# EAGLE board Talos v102 (EAGLE 9.7.0)
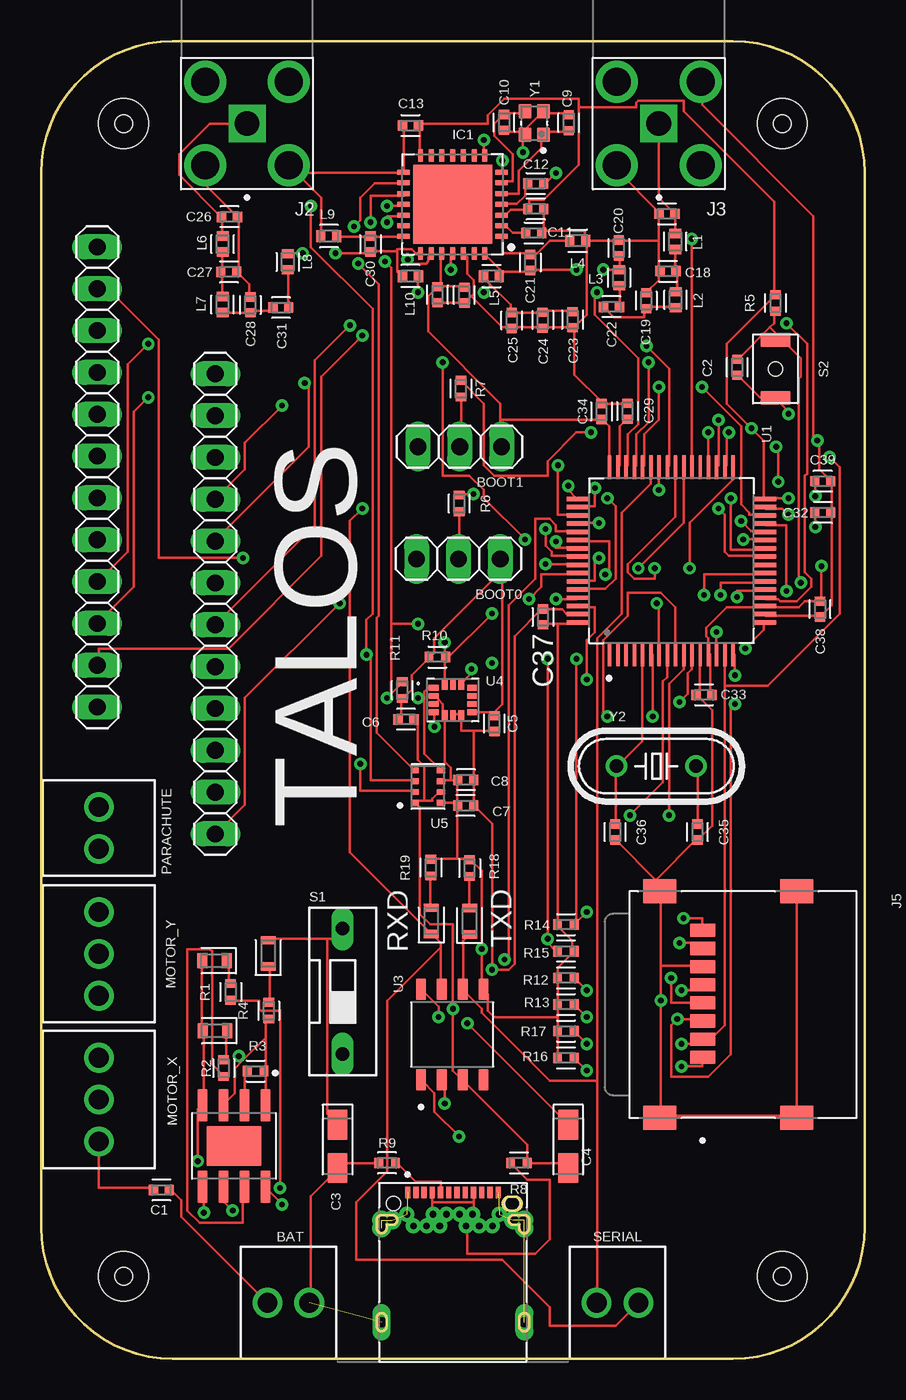
[diagram p0: board, top side]
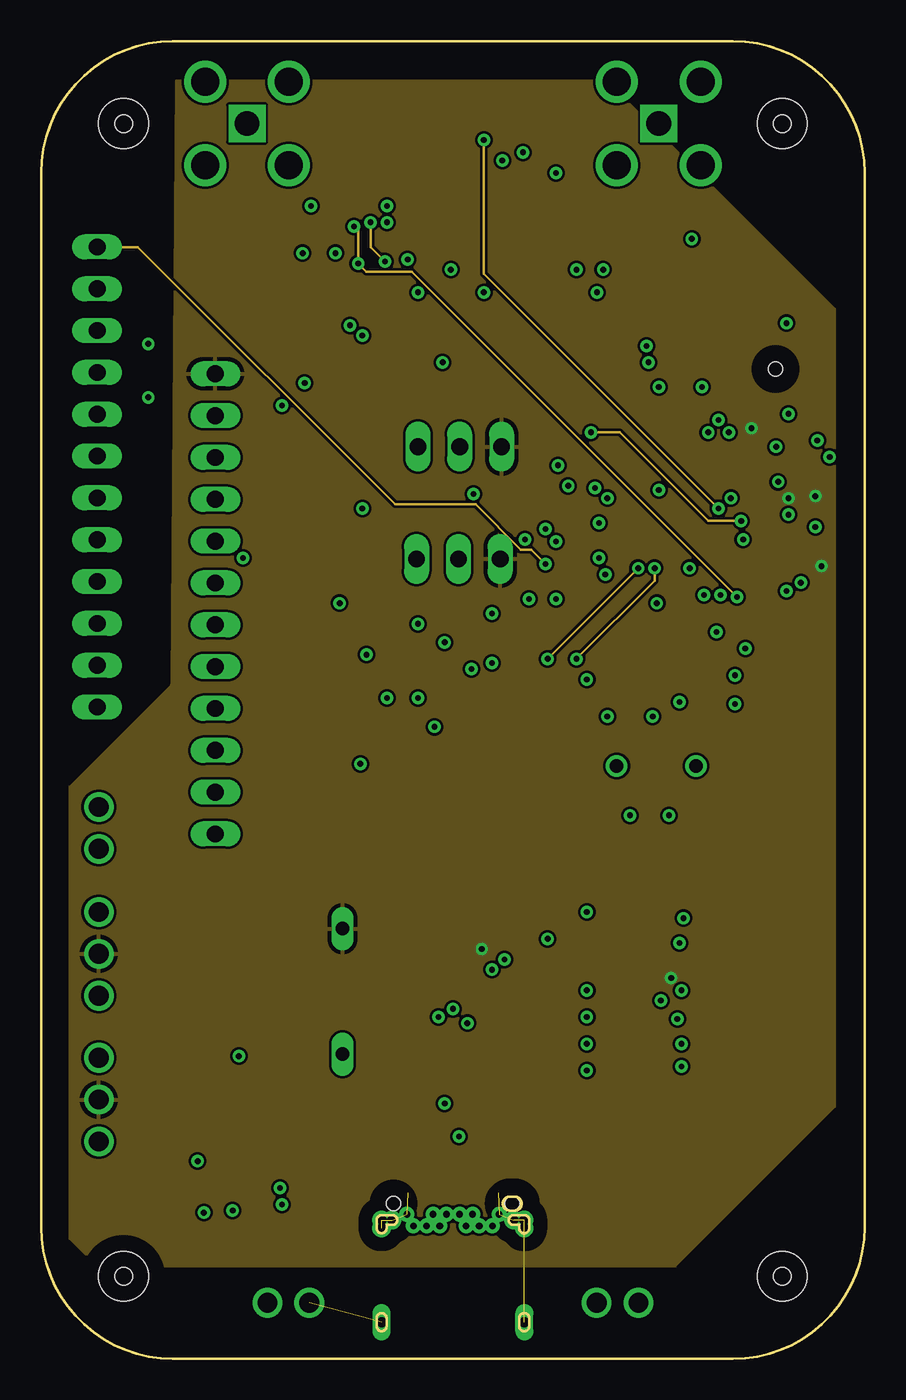
[diagram p1: board, inner layer Route2]
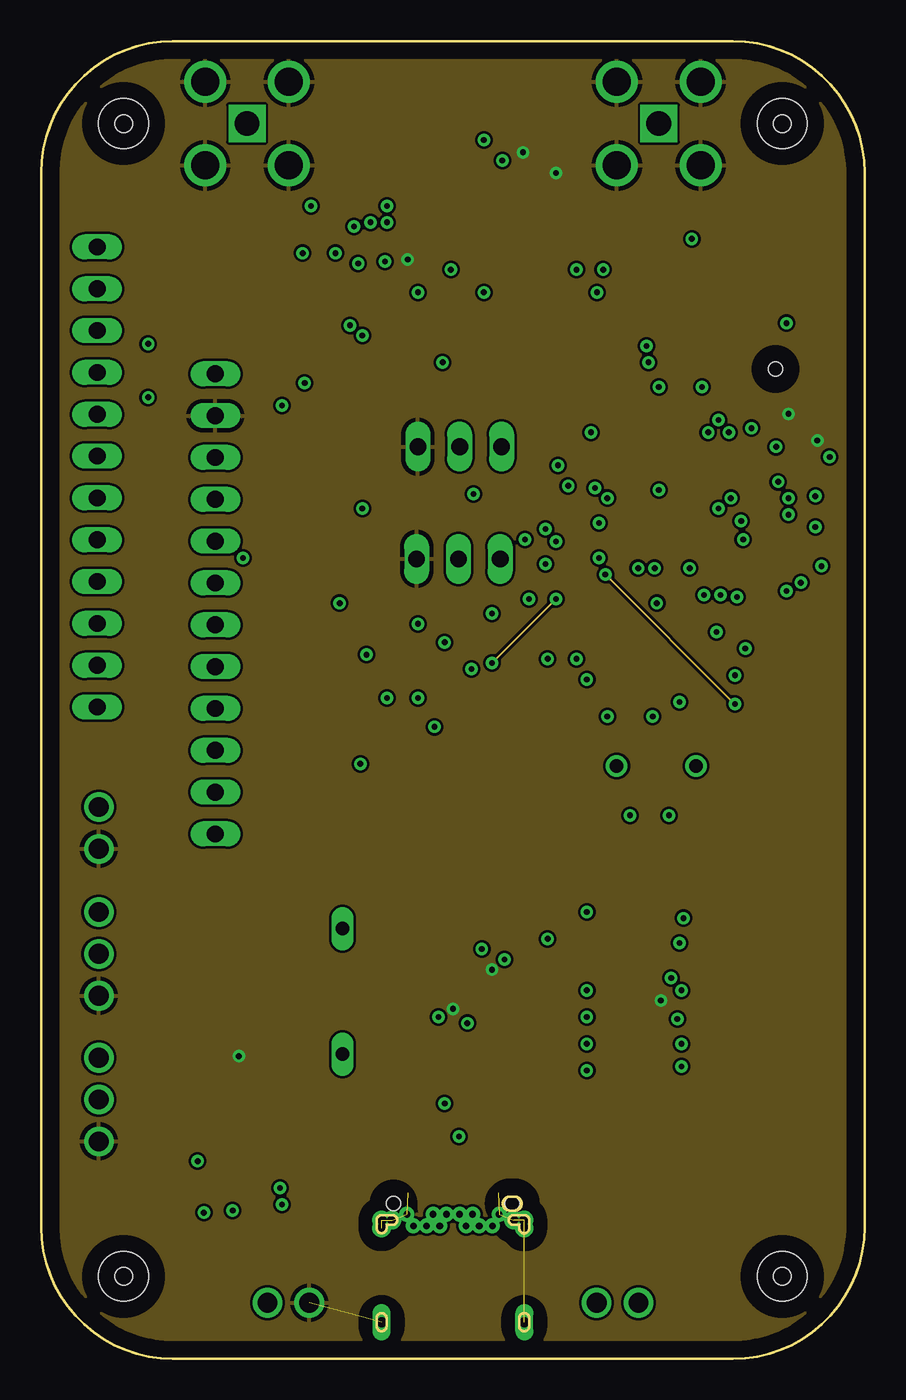
[diagram p2: board, inner layer Route15]
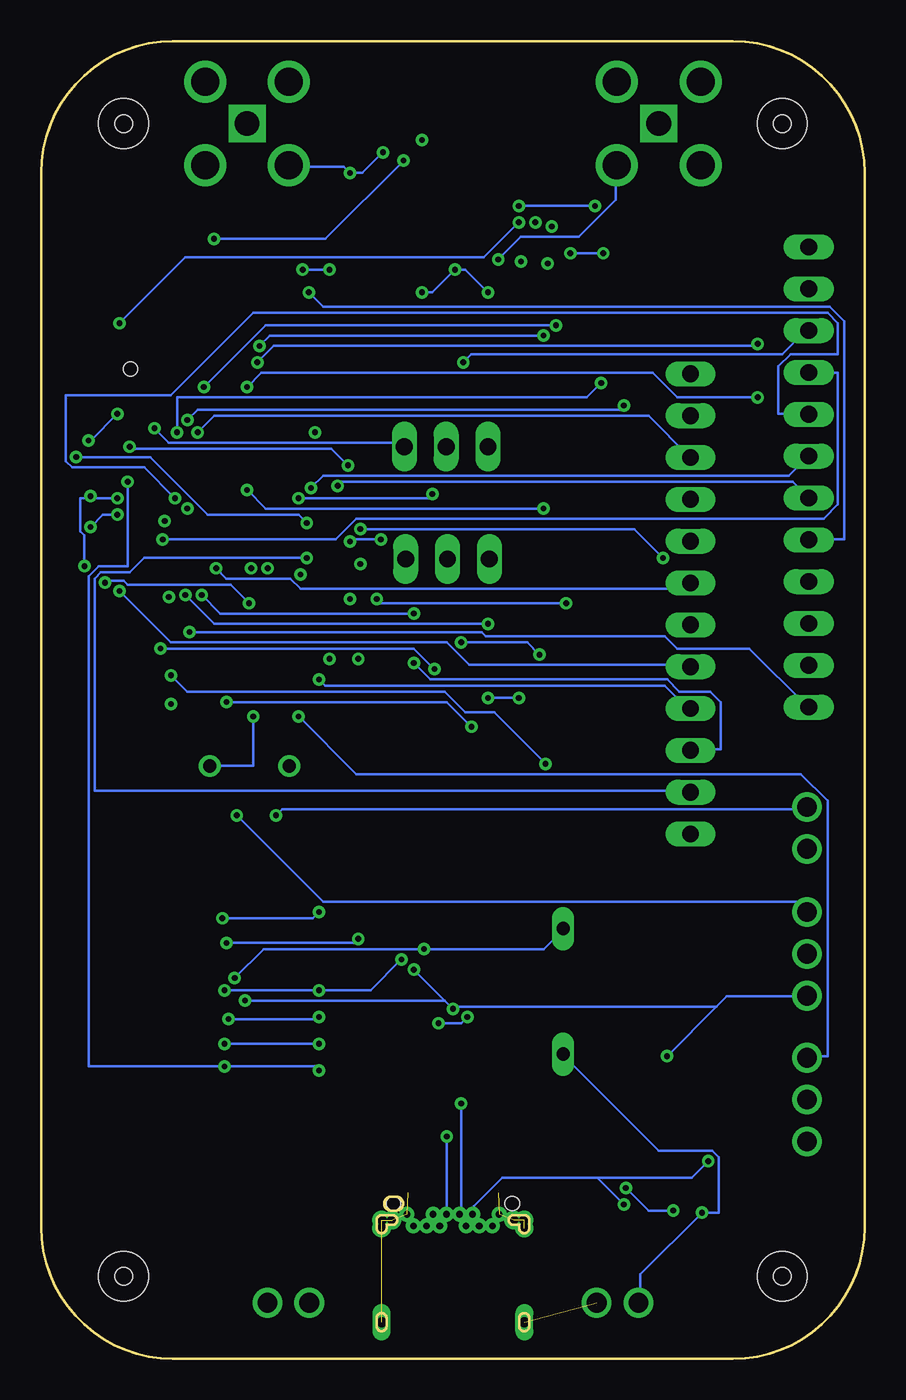
[diagram p3: board, bottom side, seen from below]

Size 50 x 80 mm. Coordinates in mm from the lower left corner, seen from the top.
Outline: 418 segments
Copper layers (1+2*15+16): Top 0.035mm / dielectric 1.5mm / Route2 0.035mm / dielectric 0.15mm / Route15 0.035mm / dielectric 0.2mm / Bottom 0.035mm
Design rules "Fusion Electronics Design Rules *": minimum track width 6mil, minimum drill 0.35mm, track to track 6mil, track to pad 6mil, pad to pad 6mil, via to via 6mil, smd to smd 6mil, copper to edge 40mil, drill to drill 6mil, minimum pad ring 10mil, minimum via ring 8mil, stop-mask expansion 4mil, vias tented up to drill 0mil, thermal gap 10mil
Holes 1.05 mm at 5,75 45,75 5,5 45,5
Holes 3 mm at 5,75 45,75 5,5 45,5

## Footprints (pad centres in the part's own frame; a part is rotated, then mirrored left to right if it is on the bottom)
TERMBLK_254-2N = drill 1.2: 1 0,0; 2 2.54,0
1X03 = drill 1.016 long: 1 -2.54,0; 2 0,0; 3 2.54,0
CAPC1005X60 = smd 0.56 x 0.629: 1 -0.485,0; 2 0.485,0
CAPMP3216X180N = smd 1.796 x 1.189: 1 -1.31,0; 2 1.31,0
LEDC1608X35N_FLAT-R = smd 0.612 x 0.912: A 0.75,0; C -0.75,0
LEDC1608X35N_FLAT-G = smd 0.612 x 0.912: A 0.75,0; C -0.75,0
QFN65P600X600X100-29T480 = smd 0.75 x 0.3: 1 -2.975,1.95; 2 -2.975,1.3; 3 -2.975,0.65; 4 -2.975,0; 5 -2.975,-0.65; 6 -2.975,-1.3; 7 -2.975,-1.95; 15 2.975,-1.95; 16 2.975,-1.3; 17 2.975,-0.65; 18 2.975,0; 19 2.975,0.65; 20 2.975,1.3; 21 2.975,1.95 | smd 0.3 x 0.75: 8 -1.95,-2.975; 9 -1.3,-2.975; 10 -0.65,-2.975; 11 0,-2.975; 12 0.65,-2.975; 13 1.3,-2.975; 14 1.95,-2.975; 22 1.95,2.975; 23 1.3,2.975; 24 0.65,2.975; 25 0,2.975; 26 -0.65,2.975; 27 -1.3,2.975; 28 -1.95,2.975 | smd 4.8 x 4.8: 29 0,0
CUI_UJ31-CH-31-SMT-TR = drill 0.6 pad 0.9: 1 -3.68,-1.66; 2 -4.33,-1.66; 3 -4.33,-2.16; 4 3.68,-1.66; 5 4.33,-1.66; 6 4.33,-2.16 | smd 0.32 x 0.7: A1 -2.75,0; A2 -2.25,0; A3 -1.75,0; A4 -1.25,0; A5 -0.75,0; A6 -0.25,0; A7 0.25,0; A8 0.75,0; A9 1.25,0; A10 1.75,0; A11 2.25,0; A12 2.75,0 | drill 0.4 pad 0.6: B1 2.8,-1.31; B2 2.4,-2.01; B3 1.6,-2.01; B4 1.2,-1.31; B5 0.8,-2.01; B6 0.4,-1.31; B7 -0.4,-1.31; B8 -0.8,-2.01; B9 -1.2,-1.31; B10 -1.6,-2.01; B11 -2.4,-2.01; B12 -2.8,-1.31 | drill 0.6 pad 0.9 long: S1 -4.33,-7.86; S2 4.33,-7.86 | hole 0.85: -3.6,-0.66; 3.6,-0.66
132203RP = drill 1.5 square: 1 0,0 | drill 1.7: 2 -2.54,2.54; 3 2.54,2.54; 4 2.54,-2.54; 5 -2.54,-2.54
CUI_MSD-10-C = smd 0.8 x 1.5: 01 3.2,-2.45; 02 2.1,-2.45; 03 1,-2.45; 04 -0.1,-2.45; 05 -1.2,-2.45; 06 -2.3,-2.45; 07 -3.4,-2.45; 08 -4.5,-2.45 | smd 1.45 x 2: G1 -6.875,3.25; G2 6.875,3.25; G3 -6.875,-5.05; G4 6.875,-5.05
1X12 = drill 1.016 long: 1 -13.97,0; 2 -11.43,0; 3 -8.89,0; 4 -6.35,0; 5 -3.81,0; 6 -1.27,0; 7 1.27,0; 8 3.81,0; 9 6.35,0; 10 8.89,0; 11 11.43,0; 12 13.97,0
INDC1006X60N = smd 0.56 x 0.729: 1 -0.485,0; 2 0.485,0
LEDC1608X39N_B = smd 0.512 x 0.912: 1 -0.8,0; 2 0.8,0
TERMBLK_254-3N = drill 1.2: 1 0,0; 2 2.54,0; 3 5.08,0
RESC1005X40 = smd 0.535 x 0.644: 1 -0.507,0; 2 0.507,0
LEDC1608X39N_R = smd 0.512 x 0.912: 1 -0.8,0; 2 0.8,0
DS-01 = drill 0.813 long: 1 0,-3.81; 2 0,3.81
B3U-1000P(M)-B = smd 0.8 x 1.8: 1 -1.75,0; 2 1.75,0 | hole 0.85: 0,0
LEDC1608X39N_G = smd 0.512 x 0.912: 1 -0.8,0; 2 0.8,0
QFP50P1200X1200X160-64N = smd 1.47 x 0.28: 1 -5.67,3.75; 2 -5.67,3.25; 3 -5.67,2.75; 4 -5.67,2.25; 5 -5.67,1.75; 6 -5.67,1.25; 7 -5.67,0.75; 8 -5.67,0.25; 9 -5.67,-0.25; 10 -5.67,-0.75; 11 -5.67,-1.25; 12 -5.67,-1.75; 13 -5.67,-2.25; 14 -5.67,-2.75; 15 -5.67,-3.25; 16 -5.67,-3.75; 33 5.67,-3.75; 34 5.67,-3.25; 35 5.67,-2.75; 36 5.67,-2.25; 37 5.67,-1.75; 38 5.67,-1.25; 39 5.67,-0.75; 40 5.67,-0.25; 41 5.67,0.25; 42 5.67,0.75; 43 5.67,1.25; 44 5.67,1.75; 45 5.67,2.25; 46 5.67,2.75; 47 5.67,3.25; 48 5.67,3.75 | smd 0.28 x 1.47: 17 -3.75,-5.67; 18 -3.25,-5.67; 19 -2.75,-5.67; 20 -2.25,-5.67; 21 -1.75,-5.67; 22 -1.25,-5.67; 23 -0.75,-5.67; 24 -0.25,-5.67; 25 0.25,-5.67; 26 0.75,-5.67; 27 1.25,-5.67; 28 1.75,-5.67; 29 2.25,-5.67; 30 2.75,-5.67; 31 3.25,-5.67; 32 3.75,-5.67; 49 3.75,5.67; 50 3.25,5.67; 51 2.75,5.67; 52 2.25,5.67; 53 1.75,5.67; 54 1.25,5.67; 55 0.75,5.67; 56 0.25,5.67; 57 -0.25,5.67; 58 -0.75,5.67; 59 -1.25,5.67; 60 -1.75,5.67; 61 -2.25,5.67; 62 -2.75,5.67; 63 -3.25,5.67; 64 -3.75,5.67
SOP127P600X175-9N = smd 1.97 x 0.6: 1 -2.475,1.905; 2 -2.475,0.635; 3 -2.475,-0.635; 4 -2.475,-1.905; 5 2.475,-1.905; 6 2.475,-0.635; 7 2.475,0.635; 8 2.475,1.905 | smd 2.413 x 3.302: 9 0,0
SOIC127P600X160-8N = smd 1.31 x 0.62: 1 -2.75,1.905; 2 -2.75,0.635; 3 -2.75,-0.635; 4 -2.75,-1.905; 5 2.75,-1.905; 6 2.75,-0.635; 7 2.75,0.635; 8 2.75,1.905
PQFN50P300X250X86-14N = smd 0.6 x 0.35: 1 -1.16,0.75; 2 -1.16,0.25; 3 -1.16,-0.25; 4 -1.16,-0.75; 8 1.16,-0.75; 9 1.16,-0.25; 10 1.16,0.25; 11 1.16,0.75 | smd 0.35 x 0.6: 5 -0.5,-0.91; 6 0,-0.91; 7 0.5,-0.91; 12 0.5,0.91; 13 0,0.91; 14 -0.5,0.91
XDCR_BMP280 = smd 0.5 x 0.35: 1 0.8,0.975; 2 0.8,0.325; 3 0.8,-0.325; 4 0.8,-0.975; 5 -0.8,-0.975; 6 -0.8,-0.325; 7 -0.8,0.325; 8 -0.8,0.975
OSCCC200X160X50 = smd 0.89 x 0.79: 1 -0.715,-0.565; 2 0.715,-0.565; 3 0.715,0.565; 4 -0.715,0.565
HC49US = drill 0.813: 1 -2.413,0; 2 2.413,0

## Placement (x,y rotation side)
BAT  TERM-BLK-2P  [TERMBLK_254-2N]  13.74,3.4 0 top
BOOT0  PINHD-1X03_1X03M  [1X03]  25.33,48.57 180 top
BOOT1  PINHD-1X03_1X03M  [1X03]  25.41,55.38 180 top
C1  0.1uF  [CAPC1005X60]  7.3,10.25 0 top
C2  0.1uF  [CAPC1005X60]  42.27,60.2 270 top
C3  0.1uF  [CAPMP3216X180N]  18,12.9 270 top
C4  0.1uF  [CAPMP3216X180N]  32,12.9 270 top
C5  100nF  [CAPC1005X60]  27.51,38.57 270 top
C6  100nF  [CAPC1005X60]  22.15,38.83 0 top
C7  100nF  [CAPC1005X60]  25.77,33.59 0 top
C8  100nF  [CAPC1005X60]  25.78,35.15 0 top
C9  15pF  [CAPC1005X60]  32.04,75.05 270 top
C10  15pF  [CAPC1005X60]  28.1,75.07 270 top
C11  100nF  [CAPC1005X60]  29.9,68.36 180 top
C12  100nF  [CAPC1005X60]  30.03,71.35 180 top
C13  100nF  [CAPC1005X60]  22.42,74.88 180 top
C14  100nF  [CAPC1005X60]  30.03,69.81 0 top
C15  100nF  [CAPC1005X60]  24.07,64.61 270 top
C16  100nF  [CAPC1005X60]  25.69,64.58 270 top
C17  4.7pF  [CAPC1005X60]  37.99,69.52 180 top
C18  12pF  [CAPC1005X60]  38.05,66.04 180 top
C19  15pF  [CAPC1005X60]  36.74,64.25 90 top
C20  6.8pF  [CAPC1005X60]  35.06,67.45 90 top
C21  2.2pF  [CAPC1005X60]  29.7,66.56 90 top
C22  47pF  [CAPC1005X60]  34.63,63.87 0 top
C23  100pF  [CAPC1005X60]  32.26,63.08 90 top
C24  47pF  [CAPC1005X60]  30.45,63.06 90 top
C25  10nF  [CAPC1005X60]  28.57,63.05 270 top
C26  1.8pF  [CAPC1005X60]  11.44,69.33 0 top
C27  4.7pF  [CAPC1005X60]  11.39,65.99 0 top
C28  4.7pF  [CAPC1005X60]  12.7,63.99 90 top
C29  100nF  [CAPC1005X60]  35.6,57.54 90 top
C30  1.5pF  [CAPC1005X60]  19.99,67.68 90 top
C31  33pF  [CAPC1005X60]  14.55,63.82 0 top
C32  100nF  [CAPC1005X60]  47.46,51.38 0 top
C33  100nF  [CAPC1005X60]  40.25,40.31 180 top
C34  100nF  [CAPC1005X60]  34.02,57.52 90 top
C35  [CAPC1005X60]  39.85,31.99 270 top
C36  [CAPC1005X60]  34.85,31.99 270 top
C37  100nF  [CAPC1005X60]  30.47,45.05 90 top
C38  100nF  [CAPC1005X60]  47.29,45.52 270 top
C39  100nF  [CAPC1005X60]  47.45,53.28 0 top
D1  LED_RED  [LEDC1608X35N_FLAT-R]  10.55,19.92 180 top
D2  LED_GREEN  [LEDC1608X35N_FLAT-G]  10.53,24.17 180 top
IC1  SX1276  [QFN65P600X600X100-29T480]  24.98,70.09 180 top
J1  USB-TYPE-C  [CUI_UJ31-CH-31-SMT-TR]  25,10.09 0 top
J2  132203RP  [132203RP]  12.5,75 180 top
J3  132203RP  [132203RP]  37.5,75 180 top
J5  MSD-10-C  [CUI_MSD-10-C]  42.61,21.51 270 top
JP1  PINHD-1X12  [1X12]  3.4,53.54 90 top
JP2  PINHD-1X12  [1X12]  10.57,45.83 90 top
L1  18nH  [INDC1006X60N]  38.5,67.84 270 top
L2  12nH  [INDC1006X60N]  38.52,64.3 270 top
L3  22nH  [INDC1006X60N]  35.09,65.64 90 top
L4  18nH  [INDC1006X60N]  32.58,67.88 180 top
L5  47nH  [INDC1006X60N]  27.33,65.74 180 top
L6  7.5nH  [INDC1006X60N]  11.01,67.68 270 top
L7  8.2nH  [INDC1006X60N]  11.01,64.01 270 top
L8  10nH  [INDC1006X60N]  14.97,66.6 90 top
L9  5.6nH  [INDC1006X60N]  17.47,68.16 0 top
L10  33nH  [INDC1006X60N]  22.42,65.74 0 top
LED1  LED-BLUE  [LEDC1608X39N_B]  13.79,24.61 90 top
MOTOR_X  TERM-BLK-3P  [TERMBLK_254-3N]  3.5,18.28 270 top
MOTOR_Y  TERM-BLK-3P  [TERMBLK_254-3N]  3.5,27.13 270 top
PARACHUTE  TERM-BLK-2P  [TERMBLK_254-2N]  3.5,33.5 270 top
R1  [RESC1005X40]  11.5,22.27 90 top
R2  [RESC1005X40]  11.08,17.65 90 top
R3  [RESC1005X40]  13.02,17.46 180 top
R4  [RESC1005X40]  13.82,21.13 90 top
R5  [RESC1005X40]  44.58,64.11 90 top
R6  10k  [RESC1005X40]  25.38,51.93 270 top
R7  10k  [RESC1005X40]  25.48,58.91 90 top
R8  5.1k  [RESC1005X40]  29,11.9 180 top
R9  5.1k  [RESC1005X40]  21,11.9 0 top
R10  10k  [RESC1005X40]  24.06,42.61 180 top
R11  10k  [RESC1005X40]  21.92,40.6 270 top
R12  [RESC1005X40]  31.86,23.13 180 top
R13  [RESC1005X40]  31.86,21.51 180 top
R14  [RESC1005X40]  31.86,26.37 180 top
R15  [RESC1005X40]  31.86,24.75 0 top
R16  [RESC1005X40]  31.86,18.28 180 top
R17  [RESC1005X40]  31.86,19.89 180 top
R18  1k  [RESC1005X40]  26.01,29.79 90 top
R19  1k  [RESC1005X40]  23.66,29.83 90 top
RXD  LED-RED  [LEDC1608X39N_R]  23.69,26.59 90 top
S1  DS-01  [DS-01]  18.3,22.31 0 top
S2  B3U-1000P(M)-B  [B3U-1000P(M)-B]  44.58,60.11 90 top
SERIAL  TERM-BLK-2P  [TERMBLK_254-2N]  33.72,3.4 0 top
TXD  LED-GREEN  [LEDC1608X39N_G]  26.01,26.57 90 top
U1  STM32F405RGT6  [QFP50P1200X1200X160-64N]  38.27,48.46 90 top
U2  TP4056  [SOP127P600X175-9N]  11.71,12.92 270 top
U3  CH340N  [SOIC127P600X160-8N]  24.96,19.7 90 top
U4  LSM6DSMTR  [PQFN50P300X250X86-14N]  25,40 0 top
U5  BMP280  [XDCR_BMP280]  23.48,34.74 180 top
Y1  FA-128_32.0000MF20X-K5  [OSCCC200X160X50]  29.93,75.02 90 top
Y2  16MHZ  [HC49US]  37.35,35.99 180 top

## Library data of the parts
BAT PARACHUTE SERIAL = Connector; CATEGORY: Fixed Terminal Blocks; DESCRIPTION: Fixed Terminal Blocks 2P SIDE ENTRY 2.54mm; MANUFACTURER: TE Connectivity AMP Connectors; MPN: 282834-2; OPERATING_TEMPERATURE: -40°C ~ 105°C; PART_STATUS: Active; PITCH: 0.100" (2.54mm); ROHS_COMPLIANCE: RoHS Compliant; SERIES: Buchanan; SUBCATEGORY: Terminal Blocks; TYPE: Through Hole; Screw - Rising Cage Clamp; Side wire entry, Horizontal with Board
BOOT0 BOOT1 = Tinkercad
C1-C39 = Capacitor; CATEGORY: Capacitor
D1 = LED; CATEGORY: LED; COLOR: RED; DESCRIPTION: CHIP LED FLAT; SUB-CATEGORY: CHIP; TYPE: FLAT_TOP
D2 = LED; CATEGORY: LED; COLOR: GREEN; DESCRIPTION: CHIP LED FLAT; SUB-CATEGORY: CHIP; TYPE: FLAT_TOP
IC1 = IC_Wireless-RF; CATEGORY: IC_Wireless-RF; DESCRIPTION: IC RF TXRX 802.15.4 28VQFN; FREQUENCY: 137 - 1020 MHz; MANUFACTURER: Semtech; MPN: SX1276IMLTRT; OPERATING_TEMP: -40°C to 85°C; PART_STATUS: Active; SERIES: SX1276; SUB-CATEGORY: Transceiver; TYPE: LoRa Core™
J1 = SnapEDA Library; MANUFACTURER: CUI Devices; MAXIMUM_PACKAGE_HEIGHT: 3.21 mm; PARTREV: 1.03; STANDARD: Manufacturer Recommendations
J2 J3 = SnapEDA Library; MANUFACTURER: AMPHENOL CONEXX; PARTREV: C; STANDARD: Manufacturer recommendations
J5 = SnapEDA Library; MANUFACTURER: CUI Devices; MAXIMUM_PACKAGE_HEIGHT: 2.07mm; PARTREV: 1.0; STANDARD: Manufacturer Recommendations
JP1 JP2 = Connector; CATEGORY: Headers; DESCRIPTION: Header, Straight, 12 Position; MANUFACTURER: Generic; MPN: Generic; OPERATING_TEMPERATURE: Generic; PART_STATUS: Active; PITCH: 0.100" (2.54mm); ROHS_COMPLIANCE: Generic; SERIES: Generic; SUB-CATEGORY: Headers, Male Pins; TYPE: Board to Board or Cable, Unshrouded, Through Hole, Straight
L1-L10 = Inductor; CATEGORY: Inductor; SUB-CATEGORY: Fixed
LED1 = Tutorial - Fusion 360; CATEGORY: Opto-Electronic; COLOR: Blue; SUB-CATEGORY: LED
MOTOR_X MOTOR_Y = Connector; CATEGORY: Fixed Terminal Blocks; DESCRIPTION: Fixed Terminal Blocks 3P TERMINAL BLOCK; MANUFACTURER: TE Connectivity AMP Connectors; MPN: 282834-3; OPERATING_TEMPERATURE: -40°C ~ 105°C; PART_STATUS: Active; PITCH: 0.100" (2.54mm); ROHS_COMPLIANCE: RoHS Compliant; SERIES: Buchanan; SUBCATEGORY: Terminal Blocks; TYPE: Through Hole; Screw - Rising Cage Clamp; Side wire entry, Horizontal with Board
R1 R2 R4-R19 = Resistor; CATEGORY: Resistor; SUB-CATEGORY: Fixed
R3 = Tinkercad; CATEGORY: Resistor; SUB-CATEGORY: Fixed
RXD = Tutorial - Fusion 360; CATEGORY: Opto-Electronic; COLOR: Red; SUB-CATEGORY: LED
S1 = Switch; CATEGORY: SWITCH; TYPE: SPST
S2 = Switch; CATEGORY: SWITCH; DESCRIPTION: Ultra-small Surface-mounting Tactile Switches with High Contact Reliability; MANUFACTURER: OMRON; OPERATING_TEMPERATURE: -25°C to +70°C at 60%RH max; PART_STATUS: ACTIVE; SERIES: B3U; TYPE: Tactile
TXD = Tutorial - Fusion 360; CATEGORY: Opto-Electronic; COLOR: Green; SUB-CATEGORY: LED
U1 = SnapEDA Library; MANUFACTURER: STMicroelectronics; PARTREV: LTR; STANDARD: IPC-7351B
U2 = SnapEDA Library; MANUFACTURER: NanJing Top Power ASIC Corp.; MAXIMUM_PACKAGE_HEIGHT: 1.75mm; STANDARD: IPC 7351B
U3 = SnapEDA Library; MANUFACTURER: WCH; MAXIMUM_PACKAGE_HEIGHT: 1.6mm; PARTREV: V3C; STANDARD: IPC 7351B
U4 = SnapEDA Library; MANUFACTURER: STMicroelectronics; MAXIMUM_PACKAGE_HEIGHT: 0.86 mm; PARTREV: Rev 7; STANDARD: IPC 7351B
U5 = SnapEDA Library; MANUFACTURER: Bosch; MP: BMP280; PART_REV: 1.19; STANDARD: MANUFACTURER RECOMMENDATIONS
Y1 = SnapEDA Library; AVAILABILITY: Good; DESCRIPTION: CRYSTAL 32MHZ 10PF SMD; MF: EPSON; MP: FA-128 32.0000MF20X-K5; PACKAGE: SMD-4 Epson; PRICE: 0.51 USD; STANDARD: IPC-7351B
Y2 = OPL_Crystal Oscillator; MPN: HC-49US 16.000MHz

## Nets
ANTENNA_IRQ: IC1.8 U1.25
B+: BAT.1 C1.2 S1.1 U2.5
BOOT0: R6.1 U1.60
BOOT1: R7.2 U1.28
BUSY: U1.24
CS_ANTENNA: IC1.19 U1.20
CS_IMU: U1.17 U4.12
CS_PRESSURE: U1.16 U5.2
D+: J1.B6 U3.1
D-: J1.B7 U3.2
GND: BAT.2 BOOT0.3 BOOT1.3 C1.1 C2.2 C3.2 C4.2 C5.2 C6.2 C7.2 C8.2 C9.1 C10.2 C11.1 C12.1 C13.2 C14.2 C15.2 C16.2 C17.2 C18.2 C19.2 C20.2 C23.1 C24.1 C25.2 C26.2 C27.2 C28.2 C29.2 C32.2 C33.2 C34.2 C35.2 C36.2 C37.2 C38.2 C39.2 IC1.15 IC1.23 IC1.26 J1.1 J1.2 J1.3 J1.4 J1.5 J1.6 J1.A1 J1.A12 J1.B1 J1.B12 J1.S1 J1.S2 J2.2 J2.3 J2.4 J2.5 J3.2 J3.3 J3.4 J3.5 J5.06 J5.G1 J5.G2 J5.G3 J5.G4 JP2.11 L4.1 L9.1 MOTOR_X.3 MOTOR_Y.3 PARACHUTE.2 R3.1 R4.1 R8.1 R9.1 S2.1 U1.12 U1.18 U1.63 U2.1 U2.3 U3.3 U4.6 U4.7 U5.1 U5.7 Y1.2 Y1.4
IMU_INT: U1.11 U4.4
MISO: IC1.17 R11.1 U1.22 U4.1 U5.5
MOSI: IC1.18 R10.1 U1.23 U4.14 U5.3
MOTOR_X: MOTOR_X.1 U1.9
MOTOR_Y: MOTOR_Y.1 U1.10
N$1: D2.C R1.2
N$2: D1.C R2.2
N$3: R1.1 U2.6
N$4: R2.1 U2.7
N$5: R3.2 U2.2
N$6: LED1.1 R4.2
N$7: BOOT0.2 R6.2
N$8: BOOT1.2 R7.1
N$9: J1.A6
N$10: J1.A7
N$11: J1.B5 R8.2
N$12: C4.1 U3.8
N$13: J1.A5 R9.2
N$14: JP1.1 U1.14
N$15: JP1.2 U1.41
N$16: C9.2 IC1.5 Y1.1
N$17: C10.1 IC1.6 Y1.3
N$18: C11.2 IC1.2
N$19: C12.2 IC1.4
N$20: C17.1 J3.1 L1.1
N$21: C18.1 L1.2 L2.1
N$22: C19.1 C22.1 L2.2
N$23: C26.1 J2.1 L6.1
N$24: C27.1 L6.2 L7.1
N$25: C22.2 L3.1
N$26: C28.1 C31.1 L7.2
N$27: C31.2 L8.1
N$28: C32.1 U1.31
N$29: C29.1 U1.47
N$30: JP1.3 U1.44
N$31: JP1.4 U1.45
N$32: JP1.5 U1.46
N$33: JP1.6 U1.49
N$34: JP1.7 U1.50
N$35: JP1.8 U1.26
N$36: JP1.9 U1.27
N$37: JP1.10 U1.55
N$38: JP1.11 U1.56
N$39: JP1.12 U1.57
N$40: JP2.1 U1.58
N$41: JP2.2 U1.59
N$42: JP2.3 U1.61
N$43: JP2.4 U1.62
N$44: JP2.5 U1.29
N$45: JP2.6 U1.30
N$46: JP2.7 U1.33
N$47: JP2.8 U1.34
N$48: JP2.9 U1.35
N$49: JP2.10 U1.36
N$50: R19.1 RXD.2
N$51: R18.1 TXD.2
OSC_IN: C36.1 U1.5 Y2.2
OSC_OUT: C35.1 U1.6 Y2.1
PARACHUTE: PARACHUTE.1 U1.8
PRESSURE_INT: U1.37
RESET: C2.1 R5.1 S2.2 U1.7
RF_RESET: IC1.7 U1.38
RFI_HF: C30.2 IC1.21 L9.2
RFI_LF: C21.2 IC1.1 L4.2
RFO_HF: C30.1 IC1.22 L8.2 L10.1
RFO_LF: C20.1 C21.1 IC1.28 L3.2 L5.1
RXD: SERIAL.1 TXD.1 U1.43 U3.6
SCK: IC1.16 U1.21 U5.4
SDIO_CLK: J5.05 R12.1 U1.53
SDIO_CMD: J5.03 R13.1 U1.54
SDIO_DAT0: J5.07 R15.1 U1.39
SDIO_DAT1: J5.08 R14.1 U1.40
SDIO_DAT2: J5.01 R16.1 U1.51
SDIO_DAT3: J5.02 R17.1 U1.15 U1.52
TXD: RXD.1 SERIAL.2 U1.42 U3.7
VBAT: U1.1
VCC: BOOT0.1 BOOT1.1 C3.1 C5.1 C6.1 C7.1 C8.1 C13.1 C14.1 C15.1 C16.1 C33.1 C34.1 C37.1 C38.1 C39.1 IC1.3 IC1.14 IC1.24 J5.04 JP2.12 LED1.2 MOTOR_X.2 MOTOR_Y.2 R5.2 R10.2 R11.2 R12.2 R13.2 R14.2 R15.2 R16.2 R17.2 R18.2 R19.2 S1.2 U1.13 U1.19 U1.32 U1.48 U1.64 U3.5 U4.2 U4.3 U4.5 U4.8 U5.6 U5.8
VIN: D1.A D2.A J1.A4 J1.A9 J1.B4 J1.B9 U2.4 U2.8
VR_PA: C23.2 C24.2 C25.1 IC1.25 L5.2 L10.2

## Tracks (layer width: path | path; a pad name or v marks a point on that pad's centre or on a via)
ANTENNA_IRQ  (via drill 0.35)
  Top 0.152: v26.88,74 26.88,73.12 IC1.8 | v41.12,51.62 41.5,51.25 41.5,49 41.75,48.75 43.88,48.75 U1.25
  Route2 0.152: v26.88,74 26.88,65.88 v41.12,51.62
B+  (via drill 0.35)
  Top 0.152: C1.2 7.88,10.25 8.5,9.62 8.5,8.62 13.62,3.5 BAT.1 | v9.88,8.88 9.88,10.38 U2.5
  Bottom 0.152: BAT.1 13.62,3.5 13.62,5.12 v9.88,8.88 8.88,8.88 8.88,12.25 9.25,12.62 12.5,12.62 18.25,18.38 S1.1
BOOT0  (via drill 0.35)
  Top 0.152: v26.25,52.5 25.5,52.5 R6.1 | v34.38,52.25 34.88,51.75 34.88,47.38 34.25,46.75 32.62,46.75 U1.60
  Bottom 0.152: v26.25,52.5 26.5,52.25 v34.38,52.25
BOOT1  (via drill 0.35)
  Top 0.152: v33.38,56.25 32.5,56.25 30.75,54.5 30.75,53.62 27.5,53.62 26.88,54.25 26.88,58 25.5,59.38 R7.2 | v42.5,50.88 43.12,50.25 43.88,50.25 U1.28
  Route2 0.152: v33.38,56.25 35.12,56.25 40.5,50.88 v42.5,50.88
CS_ANTENNA  (via drill 0.35)
  Top 0.152: v21,69 21,69.38 22,69.38 IC1.19 | v45.25,62.88 46.5,61.62 46.5,53.75 46.38,53.62 46.38,47.75 46.75,47.38 46.75,46.88 45.88,46 44.88,46 44.75,46.12 44,46.12 U1.20
  Bottom 0.152: v21,69 23.12,66.88 41.25,66.88 v45.25,62.88
CS_IMU  (via drill 0.35)
  Top 0.152: v26.12,41.88 26.12,41.62 25.5,41 U4.12 | v42.75,43.12 43.88,44.25 43.88,44.62 U1.17
  Bottom 0.152: v26.12,41.88 27.38,43.12 v42.75,43.12
CS_PRESSURE  (via drill 0.35)
  Top 0.152: v19.38,36.12 19.38,34.5 22.62,34.5 U5.2 | v42.12,41.5 42.12,42.75 U1.16
  Bottom 0.152: v19.38,36.12 22.5,39.25 24.25,39.25 25.5,40.5 41.12,40.5 v42.12,41.5
D+  (via drill 0.35)
  Top 0.152: v25.38,13.5 23.88,15 23.88,16.12 23.12,16.88 U3.1
  Bottom 0.152: v25.38,13.5 25.38,8.88 J1.B6
D-  (via drill 0.35)
  Top 0.152: v24.5,15.5 24.5,16.75 24.38,16.88 U3.2
  Bottom 0.152: v24.5,15.5 24.5,8.88 J1.B7
GND  (via drill 0.35)  (10 unrouted)
  Top 0.152: 37.62,14.75 45.75,14.75 J5.G2 45.88,14.75 45.88,28.38 J5.G1 | U1.12 40,42.75 40,40.5 39.88,40.38 C33.2 39.88,40.25 40.75,39.38 40.75,32.38 39.88,31.5 C35.2 39.75,31.5 37.38,29.12 37.38,29 | 37.38,29 37.5,28.88 37.5,28.5 J5.G3 | 37.38,29 34.88,31.5 C36.2 | 37.38,29 J5.G3 | 37.62,23.88 40.12,23.88 J5.06 | 37.62,23.88 37.62,28.38 J5.G3 | 37.62,23.88 v37.62,21.75 37.62,14.75 | 37.62,14.75 J5.G4 | 23.25,33.88 23.75,33.88 23.75,34 24.25,34.5 U5.7 | 23.25,33.88 22.75,33.88 U5.1 22.75,33.75 23,33.5 23,27 23.62,26.38 25,26.38 v25,21.25 25,17.5 25.5,17 U3.3 25.62,16.88 29.5,13 29.5,12 R8.1 29.62,11.88 32,11.88 C4.2 | 23.25,33.88 23.25,36 22.88,36.38 22.88,38.62 22.75,38.75 C6.2 | U1.63 32.5,45.25 31.88,45.25 31.62,45.5 30.5,45.5 C37.2 30.38,45.5 28.75,43.88 28.75,24 28.38,23.62 v27.38,23.62 27.38,32.5 26.38,33.5 C7.2 26.25,33.62 26.25,35.12 C8.2 26.25,35.25 26.25,38.12 | U4.6 25,39.12 25.5,39.12 U4.7 25.5,38.12 26.25,38.12 | 26.25,38.12 27.5,38.12 C5.2 | C2.2 42.38,59.62 43.62,58.38 44.5,58.38 S2.1 44.62,58.25 45.38,57.5 v45.38,57.38 | U1.18 44,45.12 47.25,45.12 C38.2 47.38,45.12 48,45.75 48,51.38 C32.2 48,51.5 48,53.25 C39.2 47.88,53.38 47.25,54 47.25,55.62 v47.12,55.75 46.88,56 46.88,69.38 40.12,76.12 40.12,77.5 J3.5 | C15.2 24.12,64.12 25.62,64.12 C16.2 25.75,64.12 26.12,64.5 | 26.12,64.5 26.25,64.62 26.25,65.5 25.88,65.88 25.88,66.88 25.75,67 IC1.26 | C29.2 35.5,58 34.12,58 C34.2 34,58.12 32.38,59.75 32.38,62.5 C23.1 | C23.1 32.25,62.62 30.5,62.62 C24.1 30.38,62.62 28.62,62.62 C25.2 28.5,62.62 28,62.62 26.12,64.5 | C19.2 36.75,64.75 37.5,65.5 37.5,66 C18.2 37.5,66.12 37.5,67.88
  Top 0.152: 37.5,67.88 37.5,69.5 C17.2 37.5,69.62 35,72.12 35,72.38 J3.3 | 30.5,68.5 30.5,69.75 C14.2 | 30.5,68.5 30.5,68.38 C11.1 30.5,68.5 | 33.12,67.88 35,67.88 C20.2 35.12,67.88 37.5,67.88 | 30.5,68.5 33,68.5 33,68 L4.1 33.12,67.88 | U2.1 13.62,15.5 13.62,17.38 R3.1 13.62,17.5 13.62,19.5 | 13.62,19.5 13.62,20.5 13.75,20.62 R4.1 | 13.62,19.5 12.25,18.12 | 12.25,18.12 11.75,17.62 11.75,16.12 11.12,15.5 U2.3 | 29.25,74.5 28.12,74.5 C10.2 | 29.25,74.5 29.25,74.38 Y1.4 | C9.1 32,75.62 30.5,75.62 Y1.2 30.38,75.62 29.25,74.5 | 29.25,74.5 Y1.4 | C28.2 12.62,64.5 12.62,65.25 12,65.88 C27.2 12,66 12,69.25 C26.2 11.88,69.38 10,71.25 10,72.38 J2.3 | R9.1 20.38,11.88 18,11.88 C3.2 18,11.5 16.38,9.88 16.38,3.5 BAT.2 | C13.2 22,74.88 22,72.12 IC1.15 22,72 15.5,72 | MOTOR_X.3 3.5,10.38 6.75,10.38 C1.1 | v31.25,72 30.62,71.38 C12.1 | 15.5,72 17,70.5 17,68.25 L9.1 | v22.25,66.75 22.25,66.5 23.38,66.5 23.5,66.62 23.5,66.88 23.62,67 IC1.23 | 15.5,72 J2.2 | v29.25,73.25 29.25,74.25 Y1.4 | v12,18.38 12.25,18.12 | 33.12,67.88 33.12,63.38 32.38,62.62 C23.1
  Bottom 0.152: v45.38,57.38 47,55.75 v47.12,55.75 | J3.3 34.88,72.38 31.62,72.38 v31.25,72 30.5,72 v29.25,73.25 | v22.25,66.75 20.88,68.12 17.38,68.12 15.12,70.38 15.12,72.38 J2.2 | 9,21.38 8.38,22 3.5,22 MOTOR_Y.3 | 9,21.38 v12,18.38 | 25.5,21.75 25.12,21.38 25,21.38 | 25.5,21.75 v27.38,23.62 | 9,21.38 25,21.38 | 25,21.38 v25,21.25 | 25.5,21.75 v37.62,21.75
  pour Route15: 8,0.08 42,0.08 42.89,0.13 43.76,0.27 44.62,0.52 45.44,0.86 46.22,1.29 46.94,1.81 47.6,2.4 48.19,3.06 48.71,3.78 49.14,4.56 49.48,5.38 49.73,6.24 49.87,7.11 49.92,8 49.92,72 49.87,72.89 49.73,73.76 49.48,74.62 49.14,75.44 48.71,76.22 48.19,76.94 47.6,77.6 46.94,78.19 46.22,78.71 45.44,79.14 44.62,79.48 43.76,79.73 42.89,79.87 42,79.92 8,79.92 7.11,79.87 6.24,79.73 5.38,79.48 4.56,79.14 3.78,78.71 3.06,78.19 2.4,77.6 1.81,76.94 1.29,76.22 0.86,75.44 0.52,74.62 0.27,73.76 0.13,72.89 0.08,72 0.08,8 0.13,7.11 0.27,6.24 0.52,5.38 0.86,4.56 1.29,3.78 1.81,3.06 2.4,2.4 3.06,1.81 3.78,1.29 4.56,0.86 5.38,0.52 6.24,0.27 7.11,0.13
IMU_INT  (via drill 0.35)
  Top 0.152: v23.88,38.38 23.88,39.25 U4.4 | v38.75,39.88 39.25,40.38 39.25,41.62 39.5,41.88 39.5,42.75 U1.11
  Bottom 0.152: v23.88,38.38 25.38,39.88 v38.75,39.88
MISO  (via drill 0.35)
  Top 0.152: 23.25,40.12 23.25,40.5 23.5,40.75 U4.1 | 23.25,40.12 23.25,36.75 24.25,35.75 U5.5 | 21.25,40.38 21.88,41 R11.1 | 23.25,40.12 v22.88,40.12 | v20,69 20,70.62 22,70.62 IC1.17 | v20.88,66.62 21.25,66.25 21.25,44.62 | 21.25,40.38 21.25,44.62 | 21.25,40.38 v21,40.12 | v41.25,46.38 41.25,47.12 43.88,47.12 U1.22 | 21.25,44.62 v22.88,44.62
  Route2 0.152: v20,69 20,67.5 v20.88,66.62
  Bottom 0.152: v22.88,40.12 v21,40.12 | v41.25,46.38 39.5,44.62 v22.88,44.62
MOSI  (via drill 0.35)
  Top 0.152: v24.5,43.5 24.5,42.62 R10.1 | U5.3 22.62,35.12 20,35.12 20,42.5 v19.75,42.75 19.75,44.88 20.12,45.25 20.12,63.75 16.38,67.5 v16.38,70 | U4.14 24.5,42.5 R10.1 | v21,70 22,70 IC1.18 | v40.25,46.38 40.25,47.62 43.88,47.62 U1.23 | v27.38,45.25 24.62,42.5 R10.1
  Bottom 0.152: v19.75,42.75 20.5,43.5 v24.5,43.5 | v16.38,70 v21,70 | v40.25,46.38 39.12,45.25 v27.38,45.25
MOTOR_X  (via drill 0.35)
  Top 0.152: v34.38,39 34.12,39.25 34.12,43.62 35.62,45.12 35.62,46.5 37.62,46.5 38.5,45.62 38.5,42.88 U1.9
  Bottom 0.152: v34.38,39 30.88,35.5 3.88,35.5 2.25,33.88 2.25,18.38 3.5,18.38 MOTOR_X.1
MOTOR_Y  (via drill 0.35)
  Top 0.152: v38.12,33 38.12,41 39,41.88 39,42.75 U1.10
  Bottom 0.152: v38.12,33 32.88,27.75 4,27.75 3.5,27.25 MOTOR_Y.1
N$1
  Top 0.152: R1.2 11.5,22.88 11.38,23 11.38,24.12 D2.C
N$2
  Top 0.152: R2.2 11.12,18.25 11.25,18.38 11.25,19.88 D1.C
N$3  (via drill 0.35)
  Top 0.152: v14.5,10.38 14.5,21.12 13.38,21.12 13.25,21.25 13.25,21.75 11.62,21.75 R1.1 | v11.62,9 11.12,9.5 11.12,10.38 U2.6
  Bottom 0.152: v14.5,10.38 13.12,9 v11.62,9
N$4
  Top 0.152: R2.1 11,17.25 10.38,17.88 10.38,24.75 10.25,24.88 8.88,24.88 8.88,9 9.62,8.25 12.25,8.25 12.25,10.38 U2.7
N$5
  Top 0.152: R3.2 12.5,17.38 12.38,17.25 12.38,15.5 U2.2
N$6
  Top 0.152: R4.2 13.88,21.75 13.88,23.75 LED1.1
N$7
  Top 0.152: R6.2 25.38,51.38 25.38,48.62 BOOT0.2
N$8
  Top 0.152: R7.1 25.5,58.38 25.5,55.5 BOOT1.2
N$11
  Top 0.152: R8.2 28.5,11.88 29.5,10.88 30.88,10.88 30.88,7.25 30,6.38 25.88,6.38 25.88,8 J1.B5
N$12  (via drill 0.35)
  Top 0.152: v24.12,20.75 24.12,21.38 23.12,22.38 U3.8 | v25.88,20.38 32,14.25 C4.1
  Bottom 0.152: v24.12,20.75 24.5,20.38 v25.88,20.38
N$13
  Top 0.152: J1.A5 24.25,10.75 22.75,10.75 21.62,11.88 R9.2
N$14  (via drill 0.35)
  Top 0.152: v41,44.12 41,42.88 U1.14
  Bottom 0.152: v41,44.12 23.25,44.12 23,43.88 12.12,43.88 11.38,43.12 7,43.12 3.5,39.62 JP1.1
N$15  (via drill 0.35)
  Top 0.152: v36.75,61.5 38.12,60.12 38.12,54.25 U1.41 | v19.5,62.12 17,59.62 17,48.75 11.38,43.12 3.5,43.12 3.5,42.12 JP1.2
  Bottom 0.152: v36.75,61.5 36.12,62.12 v19.5,62.12
N$16
  Top 0.152: C9.2 32,74.5 30.5,74.5 30.5,74.38 Y1.1 30.38,74.25 30.38,73.5 29,72.12 29,70.75 28,70.75 IC1.5
N$17
  Top 0.152: Y1.3 29.25,75.62 28.12,75.62 C10.1 28,75.5 27.5,75 27.5,74.25 28.62,73.12 28.62,71.5 28,71.5 IC1.6
N$18
  Top 0.152: C11.2 29.38,68.38 28.62,68.38 28.25,68.75 28,68.75 IC1.2
N$19
  Top 0.152: C12.2 29.5,71.25 29.38,71.12 29.38,70.62 28.88,70.12 28,70.12 IC1.4
N$20
  Top 0.152: L1.1 38.5,68.38 38.5,69.5 C17.1 38.38,69.62 37.5,70.5 J3.1
N$21
  Top 0.152: L1.2 38.5,67.25 38.5,66.12 C18.1 38.62,66 38.62,64.88 L2.1
N$22
  Top 0.152: C22.1 34.25,63.75 34.75,63.25 36.62,63.25 36.62,63.75 C19.1 36.75,63.88 38.5,63.88 L2.2
N$23
  Top 0.152: L6.1 11,68.25 11,69.25 C26.1 10.88,69.38 8.38,71.88 8.38,73.12 10.25,75 J2.1
N$24
  Top 0.152: L6.2 11,67.12 11,66 C27.1 11,65.88 L7.1
N$25
  Top 0.152: C22.2 35.12,63.88 35.12,65.12 L3.1
N$26
  Top 0.152: C31.1 14,63.75 14,63.62 12.75,63.62 C28.1 12.62,63.5 11.12,63.5 L7.2
N$27
  Top 0.152: C31.2 15,63.88 15,66 L8.1
N$28  (via drill 0.35)
  Top 0.152: v47,50.5 47,51.38 C32.1 | v45.38,51.25 45,51.62 44,51.62 U1.31
  Bottom 0.152: v47,50.5 46.25,51.25 v45.38,51.25
N$29
  Top 0.152: C29.1 35.5,57 35.12,56.62 35.12,54.25 U1.47
N$30  (via drill 0.35)
  Top 0.152: v37.5,59 37.5,57 36.62,56.12 36.62,54.25 U1.44 | v6.5,58.38 5.62,57.5 5.62,46.88 3.5,44.75 JP1.3
  Bottom 0.152: v37.5,59 36.62,59.88 12.88,59.88 11.38,58.38 v6.5,58.38
N$31  (via drill 0.35)
  Top 0.152: v36.88,60.5 36.88,56.88 36.12,56.12 36.12,54.25 U1.45 | v6.5,61.62 5.25,60.38 5.25,49 3.5,47.25 JP1.4
  Bottom 0.152: v36.88,60.5 35.88,61.5 6.62,61.5 v6.5,61.62
N$32  (via drill 0.35)
  Top 0.152: v33.75,64.75 33.62,64.62 33.62,63.38 36.25,60.75 36.25,56.75 35.62,56.12 35.62,54.25 U1.46
  Bottom 0.152: v33.75,64.75 32.88,63.88 2.12,63.88 1.25,63 1.25,49.75 3.38,49.75 JP1.5
N$33  (via drill 0.35)
  Top 0.152: v32,53 32,52.75 32.5,52.25 U1.49
  Bottom 0.152: v32,53 31.75,53.25 4.38,53.25 3.5,52.38 JP1.6
N$34  (via drill 0.35)
  Top 0.152: v33.62,52.88 33.62,51.75 32.62,51.75 U1.50
  Bottom 0.152: v33.62,52.88 32.88,53.62 4.62,53.62 3.5,54.75 JP1.7
N$35  (via drill 0.35)
  Top 0.152: v41.88,52.25 41.88,49.12 43.88,49.12 U1.26
  Bottom 0.152: v41.88,52.25 43.75,54.12 48.12,54.12 48.5,54.5 48.5,58.5 42.12,58.5 37.12,63.5 2.25,63.5 1.62,62.88 1.62,61 4.5,61 5.25,60.25 5.25,57.38 3.5,57.38 JP1.8
N$36  (via drill 0.35)
  Top 0.152: v42.62,49.75 43.88,49.75 U1.27
  Bottom 0.152: v42.62,49.75 32.12,49.75 30.88,51 2.5,51 1.62,51.88 1.62,59.88 3.38,59.88 JP1.9
N$37  (via drill 0.35)
  Top 0.152: v31.25,49.62 31.25,49.25 32.5,49.25 U1.55 | v29.38,49.75 26.88,52.25 26.88,52.75 26,53.62 24.38,53.62 v24.38,60.5
  Bottom 0.152: v31.25,49.62 31.12,49.75 v29.38,49.75 | v24.38,60.5 23.88,61 5,61 3.62,62.38 3.5,62.38 JP1.10
N$38  (via drill 0.35)
  Top 0.152: v30.62,50.38 30.62,49.38 31,49 31,48.75 32.5,48.75 U1.56 | v12.25,48.62 7.12,48.62 7.12,61.88 4.12,64.88 3.5,64.88 JP1.11
  Bottom 0.152: v30.62,50.38 14,50.38 v12.25,48.62
N$39  (via drill 0.35)
  Top 0.152: v30.62,48.25 32.5,48.25 U1.57
  Route2 0.152: v30.62,48.25 29.75,49.12 29.12,49.12 26.38,51.88 21.5,51.88 5.88,67.5 3.5,67.5 JP1.12
N$40  (via drill 0.35)
  Top 0.152: v29.62,46.12 30.38,46.88 30.38,47.62 32.5,47.62 U1.58 | v18.12,45.88 12.38,40.12 12.38,33.62 10.62,31.88 JP2.1
  Bottom 0.152: v29.62,46.12 29.38,45.88 v18.12,45.88
N$41  (via drill 0.35)
  Top 0.152: v33.88,48.62 33.62,48.38 33.62,47.25 32.62,47.25 U1.59
  Bottom 0.152: v33.88,48.62 43.75,48.62 44.62,47.75 46.38,47.75 46.75,47.38 46.75,34.5 10.62,34.5 JP2.2
N$42  (via drill 0.35)
  Top 0.152: v31.25,46.12 32.5,46.12 U1.61
  Route15 0.152: v27.38,42.25 v31.25,46.12
  Bottom 0.152: v27.38,42.25 26.38,41.25 12,41.25 11.25,40.5 9.38,40.5 8.75,39.88 8.75,37 10.5,37 JP2.3
N$43  (via drill 0.35)
  Top 0.152: v33.12,41.25 33.12,43.62 33.62,44.12 33.62,45.62 32.62,45.62 U1.62
  Bottom 0.152: v33.12,41.25 32.75,40.88 12.12,40.88 10.75,39.5 10.62,39.5 JP2.4
N$44  (via drill 0.35)
  Top 0.152: v45.25,46.62 45.25,50.62 44,50.62 U1.29
  Bottom 0.152: v45.25,46.62 42.12,43.5 25.38,43.5 24,42.12 10.62,42.12 JP2.5
N$45  (via drill 0.35)
  Top 0.152: v40.12,59 42.5,56.62 42.5,51.88 43,51.38 43,51.25 43.88,51.25 U1.30 | v18.75,62.75 16.62,60.62 16.62,50.62 10.62,44.62 JP2.6
  Bottom 0.152: v40.12,59 36.38,62.75 v18.75,62.75
N$46  (via drill 0.35)
  Top 0.152: v39.38,48 39.38,50.75 42,53.38 42,54.12 U1.33
  Bottom 0.152: v39.38,48 38.75,47.38 34.88,47.38 34.25,46.75 10.88,46.75 10.62,47 JP2.7
N$47  (via drill 0.35)
  Top 0.152: v41.75,56.25 41.62,56.12 41.62,54.25 U1.34 | v16,59.25 16.25,59 16.25,55.38 10.62,49.75 JP2.8
  Bottom 0.152: v41.75,56.25 41.75,58.38 16.88,58.38 v16,59.25
N$48  (via drill 0.35)
  Top 0.152: v41.12,57 41.12,54.25 U1.35 | v14.62,57.88 12.38,55.62 12.38,54 10.62,52.25 JP2.9
  Bottom 0.152: v41.12,57 40.5,57.62 14.88,57.62 v14.62,57.88
N$49  (via drill 0.35)
  Top 0.152: v40.5,56.25 40.5,54.25 U1.36
  Bottom 0.152: v40.5,56.25 39.5,57.25 13.12,57.25 10.62,54.75 JP2.10
N$50
  Top 0.152: R19.1 23.62,29.25 23.62,27.5 RXD.2
N$51
  Top 0.152: R18.1 26,29.25 TXD.2
OSC_IN
  Top 0.152: C36.1 34.88,32.5 34.88,35.88 Y2.2 35,36 36.5,37.5 36.5,42.75 U1.5
OSC_OUT  (via drill 0.35)
  Top 0.152: C35.1 39.88,32.5 39.88,35.88 Y2.1 | v37.12,39 37.12,42.75 U1.6
  Bottom 0.152: v37.12,39 37.12,36 Y2.1
PARACHUTE  (via drill 0.35)
  Top 0.152: v35.75,33 37.75,35 37.75,41.12 38,41.38 38,42.75 U1.8
  Bottom 0.152: v35.75,33 35.38,33.38 3.62,33.38 PARACHUTE.1
RESET  (via drill 0.35)
  Top 0.152: 44.25,62.62 44.5,62.88 44.5,63.5 R5.1 | 44.25,62.62 42.38,60.75 C2.1 | v37.38,45.88 37.5,45.75 37.5,42.88 U1.7 | v46.12,47.12 46,47.25 46,59.5 46.12,59.62 46.12,60.75 44.75,62.12 | 44.25,62.62 44.75,62.12 | 44.75,62.12 44.75,62 44.62,61.88 S2.2
  Bottom 0.152: v37.38,45.88 38.5,47 44.75,47 45,47.25 46,47.25 v46.12,47.12
RF_RESET  (via drill 0.35)
  Top 0.152: v28,72.75 28,72.12 IC1.7 | v39.5,68 39.5,54.25 U1.38
  Bottom 0.152: v28,72.75 32.75,68 v39.5,68
RFI_HF
  Top 0.152: L9.2 18,68.12 19.88,68.12 C30.2 20,68.12 22,68.12 IC1.21
RFI_LF
  Top 0.152: IC1.1 28,68.12 28,67.12 29.62,67.12 C21.2 29.75,67.12 30.12,67.12 30.88,67.88 32,67.88 L4.2
RFO_HF  (via drill 0.35)
  Top 0.152: 21.62,67.25 20,67.25 C30.1 19.88,67.12 v17.88,67.12 | 21.62,67.25 21.62,66 21.88,65.75 L10.1 | v15.88,67.12 15,67.12 L8.2 | 21.62,67.25 21.62,67.38 22.5,67.38 22.75,67.12 23,67.12 IC1.22
  Bottom 0.152: v17.88,67.12 v15.88,67.12
RFO_LF  (via drill 0.35)
  Top 0.152: C20.1 35.12,66.88 35.12,66.12 L3.2 35,66.12 v34.12,66.12 | 27.88,66 29.62,66 C21.1 29.75,66.12 v32.5,66.12 | 27.88,66 27.88,65.75 L5.1 27.88,66 | 27.88,66 27.88,66.12 27,67 IC1.28
  Bottom 0.152: v32.5,66.12 v34.12,66.12
RXD
  Top 0.152: TXD.1 26,25.75 25.62,25.38 25.62,22.5 U3.6 25.62,22.38 26.75,21.25 26.75,21 30.88,16.88 33.75,16.88 | 33.75,16.88 33.75,3.5 SERIAL.1 | 33.75,16.88 33.75,43.75 35.25,45.25 35.25,51.38 37,53.12 37,54.12 U1.43
SCK  (via drill 0.35)
  Top 0.152: v19.25,66.5 20.5,65.25 20.5,45.12 20.38,45 20.38,38 22.62,35.75 U5.4 | v19,68.75 19.38,69.12 19.38,70.5 20.25,71.38 22,71.38 IC1.16 | v42.25,46.25 42.25,46.62 43.88,46.62 U1.21
  Route2 0.152: v19,68.75 19.25,68.5 v19.25,66.5 19.75,66 22.5,66 v42.25,46.25
SDIO_CLK  (via drill 0.35)
  Top 0.152: v33.12,22.38 R12.1 | v38.88,22.38 40.12,22.38 40.12,22.62 J5.05 | v28.12,24.25 28.38,24.5 28.38,45.75 30,47.38 30,51 30.88,51 31.25,50.62 31.25,50.25 32.5,50.25 U1.53
  Bottom 0.152: v38.88,22.38 v33.12,22.38 30,22.38 v28.12,24.25
SDIO_CMD  (via drill 0.35)
  Top 0.152: v33.12,20.75 R13.1 | J5.03 40.12,20.62 v38.62,20.62 38.25,20.25 38.25,17.12 40.5,17.12 41.88,18.5 41.88,39.5 v42.12,39.75 | v34.25,47.62 34.5,47.88 34.5,49.62 32.62,49.62 U1.54
  Route15 0.152: v42.12,39.75 v34.25,47.62
  Bottom 0.152: v33.12,20.75 33.25,20.62 v38.62,20.62
SDIO_DAT0  (via drill 0.35)
  Top 0.152: v38.75,25.25 40.12,25.25 40.12,25 J5.07 | R15.1 31.25,24.75 30.75,25.25 v30.75,25.5 v30.75,42.5 | v36.25,48 39,50.75 39,54.12 U1.39
  Route2 0.152: v30.75,42.5 v36.25,48
  Bottom 0.152: v30.75,25.5 31,25.25 v38.75,25.25
SDIO_DAT1  (via drill 0.35)
  Top 0.152: v33.12,27.12 32.5,26.5 | 32.5,26.5 R14.1 32.5,26.5 | v39,26.75 40.12,26.75 40.12,26.12 J5.08 | v37.25,48 37.25,47.38 36,47.38 35.62,47.75 35.62,48.25 38.5,51.12 38.5,54.12 U1.40 | 32.5,26.5 v32.5,42.5
  Route2 0.152: v37.25,48 37.25,47.25 v32.5,42.5
  Bottom 0.152: v33.12,27.12 33.5,26.75 v39,26.75
SDIO_DAT2  (via drill 0.35)
  Top 0.152: v33.12,17.5 32.38,18.25 R16.1 | v38.88,17.75 40.12,17.75 40.12,18.25 J5.01 | v31.38,54.25 31.38,51.25 32.5,51.25 U1.51 | v44.62,55.38 44.75,55.25 v44.75,53.25
  Bottom 0.152: v33.12,17.5 33.38,17.75 v38.88,17.75 47.12,17.75 47.12,47.5 46.5,48.12 44.75,48.12 v44.75,53.25 | v31.38,54.25 32.38,55.25 44.5,55.25 v44.62,55.38
SDIO_DAT3  (via drill 0.35)
  Top 0.152: v33.12,19.12 32.38,19.88 R17.1 | v38.88,19.12 40.12,19.12 40.12,19.38 J5.02 40.25,19.5 40.75,19.5 41.5,20.25 41.5,40.88 | 41.5,40.88 41.5,42.75 U1.15 | v33.88,50.75 32.62,50.75 U1.52 | v47.88,54.75 48.5,54.12 48.5,45.25 44.12,40.88 41.5,40.88
  Bottom 0.152: v38.88,19.12 v33.12,19.12 | v33.88,50.75 34.38,51.25 39.88,51.25 43.38,54.75 v47.88,54.75
TXD  (via drill 0.35)
  Top 0.152: 24.25,25 24.25,22.5 U3.7 | 24.25,25 24.25,25.25 23.75,25.75 RXD.1 23.62,25.88 18.75,30.75 18.75,50.88 v19.5,51.62 | v37.5,52.75 37.5,54.12 U1.42 | 24.25,25 21,21.75 21,11.38 19.12,9.5 19.12,6 28,6 30.88,3.12 30.88,2 34.88,2 36.25,3.38 SERIAL.2
  Bottom 0.152: v37.5,52.75 36.38,51.62 v19.5,51.62
VCC  (via drill 0.35)
  Top 0.152: IC1.14 23,73.12 23,74.88 C13.1 23,75 27.12,75 27.12,75.5 28.12,76.5 32.62,76.5 32.62,76 | IC1.3 28,69.5 28.25,69.5 28.5,69.75 29.5,69.75 C14.1 29.62,69.88 29.62,70.38 30.5,70.38 32.62,72.5 32.62,76 | C33.1 40.62,40.38 40.62,42.75 U1.13 40.5,42.88 40.5,43.75 40.38,43.88 40.38,44.38 41.62,45.62 43.88,45.62 U1.19 44,45.62 46,45.62 46.38,46 47.25,46 C38.1 47.38,46.12 v47.38,48.12 | v47,52.38 47,53.25 C39.1 | v45.38,52.25 44,52.25 U1.32 43.88,52.25 43.88,55.75 v43.12,56.5 41.62,58 41.62,61.62 44.5,64.5 R5.2 44.5,64.62 44.5,70.25 39,75.75 39,76.38 36.25,76.38 36.12,76.25 36.12,76 32.62,76 | 25.25,30.38 23.75,30.38 R19.2 | 25.25,30.38 26,30.38 R18.2 26.12,30.25 26.75,29.62 v26.75,24.88 26.75,22.5 U3.5 26.88,22.38 27.12,22.12 27.12,21.12 27.5,20.75 31.38,20.75 | 24.12,40 23.88,40.25 U4.2 | 24.12,40 24.38,39.75 24.38,39.25 24.5,39.12 U4.5 24.5,36.25 24.88,35.88 24.88,35.12 | 24.12,40 23.88,39.75 U4.3 | 25.25,35.12 24.88,35.12 | 24.88,35.12 24.38,35.12 U5.6 | 25.25,33.75 24.38,33.75 U5.8 | 25.25,33.75 25.25,33.62 C7.1 | 25.25,33.75 25.25,35.12 | 25.25,35.12 C8.1 | 25.25,33.75 C7.1 | 25.25,30.38 25.25,33.5 C7.1 | 31.38,44.62 32.5,44.62 U1.64 | 31.38,44.62 30.5,44.62 C37.1 | R16.2 31.38,18.38 31.38,19.88 R17.2 31.38,20 31.38,20.75 | 31.38,20.75 31.38,21.5 R13.2 31.38,21.62 31.38,23.12 R12.2 31.38,23.25 31.38,23.75 32.25,24.62 R15.2 32.25,24.75 32.25,25.38 31.38,26.25 R14.2 31.38,26.38 31.38,44.62 | C6.1 21.75,38.88 21.88,39 21.88,40 R11.2 22,40.12 22.5,40.62 22.5,41.5 23.5,42.5 R10.2 23.62,42.62 23.88,42.88 23.88,43.75 28,47.88 | U1.48 34.5,54.25 34.5,56.62 34.12,57 C34.1 34,57 27.88,57
  Top 0.152: 24.25,65.12 24.12,65.12 C15.1 | 24.25,65.12 25.62,65.12 C16.1 | 24.25,65.12 24.25,67 IC1.24 | 24.25,65.12 C15.1 | 27.5,39.25 U4.8 | 27.5,39.25 27.5,39.12 C5.1 27.5,39.25 | 17.38,25.5 18.25,25.5 18.25,26 S1.2 | 17.38,25.5 13.88,25.5 LED1.2 | 27.5,39.25 28,39.75 28,47.88 | 28,47.88 28,48.38 27.88,48.5 BOOT0.1 28,47.88 | v38.25,23.12 38.25,21.62 40.12,21.62 J5.04 | 17.38,25.5 17.38,14.88 18,14.25 C3.1 | 27.88,57 27.88,55.5 BOOT1.1 | 27.88,57 27.88,58 23.5,62.38 23.5,64.5 24,65 C15.1
  Bottom 0.152: v45.38,52.25 46.88,52.25 | v47.38,48.12 47.38,50 47.62,50.25 47.62,52.25 46.88,52.25 | 46.88,52.25 v47,52.38 | v38.25,23.12 36.5,24.88 v26.75,24.88 19.5,24.88 18.38,26 S1.2 | v43.12,56.5 42.25,55.62 28.12,55.62 28,55.5 BOOT1.1
  pour Route2: 3.41,5.63 38.5,5.63 48.18,15.3 48.18,63.77 34.35,77.6 8.2,77.6 7.92,40.95 7.92,40.93 7.91,40.93 7.91,40.93 7.91,40.92 7.9,40.91 7.9,40.91 7.9,40.91 7.89,40.9 1.73,34.74 1.73,7.3
VIN  (via drill 0.35)
  Top 0.152: D2.A 9.75,24.12 9.75,20 D1.A 9.88,19.88 9.88,15.5 U2.4 9.75,15.38 9.5,15.12 v9.5,12 | 26.25,9.5 26.25,8.88 J1.B4 | 26.25,9.5 J1.A9 | 23.75,9.5 23.75,8.88 J1.B9 | 23.75,9.5 J1.A4 | v14.62,9.38 13.62,10.38 U2.8 | 23.75,9.5 26.25,9.5
  Bottom 0.152: 16.25,11 v14.62,9.38 | 16.25,11 22,11 23.75,9.25 23.75,8.88 J1.B9 | v9.5,12 10.5,11 16.25,11
VR_PA  (via drill 0.35)
  Top 0.152: v22.88,64.75 22.88,65.62 L10.2 | v24.88,66.12 24.88,67 IC1.25 | C23.2 32.25,63.62 30.5,63.62 C24.2 30.38,63.5 28.62,63.5 C25.1 28.5,63.62 28.5,64 27.25,65.25 | 27.25,65.25 26.88,65.62 L5.2 | v26.88,64.75 27.25,65.12 27.25,65.25
  Bottom 0.152: v22.88,64.75 24.25,66.12 v24.88,66.12 26.25,64.75 v26.88,64.75

## Text on the board
tPlace: TALOS